# EAGLE board NE555_2 (EAGLE 6.5.0)
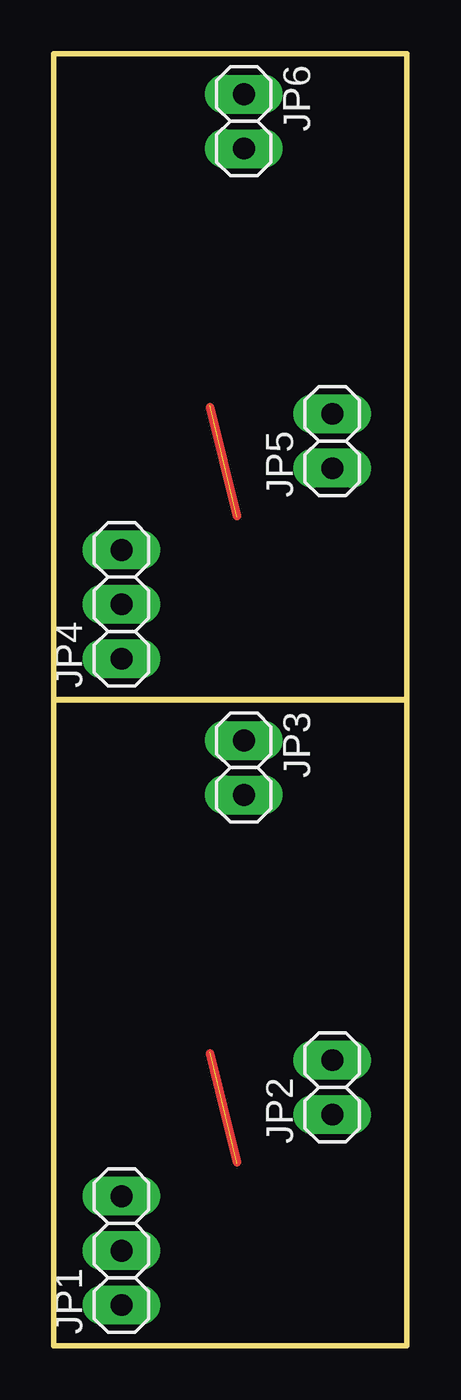
[diagram p0: board, top side]
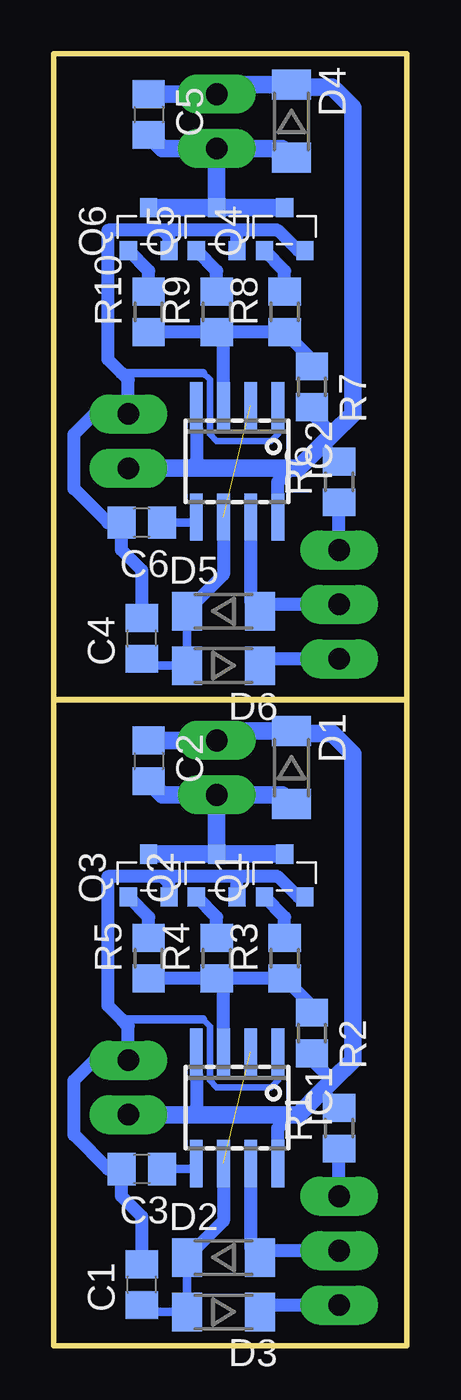
[diagram p1: board, bottom side, seen from below]

Size 16.51 x 60.31 mm. Coordinates in mm from the lower left corner, seen from the top.
Outline: 0,0 0,30.15
Outline: 0,30.16 0,60.31
Outline: 16.51,0 16.51,30.15 0.01,30.15 0.01,0 16.51,0
Outline: 16.51,30.16 16.51,60.31 0.01,60.31 0.01,30.16 16.51,30.16
Copper layers (1*16): Top 0.035mm / dielectric 1.5mm / Bottom 0.035mm
Design rules "default": minimum track width 12mil, minimum drill 32mil, track to track 12mil, track to pad 12mil, pad to pad 12mil, via to via 12mil, smd to smd 8mil, copper to edge 40mil, drill to drill 8mil, minimum pad ring 16mil, minimum via ring 12mil, stop-mask expansion 4mil, vias tented up to drill 0mil, thermal gap 20mil

## Footprints (pad centres in the part's own frame; a part is rotated, then mirrored left to right if it is on the bottom)
C0805 = smd 1.3 x 1.5: 1 -0.95,0; 2 0.95,0
SOD80 = smd 1.4 x 1.8: 1 -1.7,0; 2 1.7,0
SO08 = smd 0.6 x 2.2: 1 -1.905,-2.6; 2 -0.635,-2.6; 3 0.635,-2.6; 4 1.905,-2.6; 5 1.905,2.6; 6 0.635,2.6; 7 -0.635,2.6; 8 -1.905,2.6
1X03 = drill 1.016 long: 1 -2.54,0; 2 0,0; 3 2.54,0
1X02 = drill 1.016 long: 1 -1.27,0; 2 1.27,0
SOT-23-GSD = smd 0.8 x 0.9: D 0,2; G -0.95,0; S 0.95,0
R0805 = smd 1.3 x 1.5: 1 -0.95,0; 2 0.95,0

## Placement (x,y rotation side)
C1  2.7nF  [C0805]  12.38,2.86 90 bottom
C2  330nF  [C0805]  12.06,27.3 270 bottom
C3  1nF  [C0805]  12.38,8.26 180 bottom
C4  2.7nF  [C0805]  12.38,33.02 90 bottom
C5  330nF  [C0805]  12.06,57.47 270 bottom
C6  1nF  [C0805]  12.38,38.42 180 bottom
D1  DIODE  [SOD80]  5.4,26.99 270 bottom
D2  DIODE  [SOD80]  8.57,4.13 0 bottom
D3  DIODE  [SOD80]  8.57,1.59 180 bottom
D4  DIODE  [SOD80]  5.4,57.15 270 bottom
D5  DIODE  [SOD80]  8.57,34.29 0 bottom
D6  DIODE  [SOD80]  8.57,31.75 180 bottom
IC1  NE555  [SO08]  7.94,11.11 180 bottom
IC2  NE555  [SO08]  7.94,41.27 180 bottom
JP1  [1X03]  3.17,4.45 90 top
JP2  [1X02]  13.02,12.06 90 top
JP3  [1X02]  8.89,26.99 270 top
JP4  [1X03]  3.17,34.61 90 top
JP5  [1X02]  13.02,42.23 90 top
JP6  [1X02]  8.89,57.15 270 top
Q1  SI2302  [SOT-23-GSD]  5.71,20.95 0 bottom
Q2  SI2302  [SOT-23-GSD]  8.89,20.95 0 bottom
Q3  SI2302  [SOT-23-GSD]  12.06,20.95 0 bottom
Q4  SI2302  [SOT-23-GSD]  5.71,51.12 0 bottom
Q5  SI2302  [SOT-23-GSD]  8.89,51.12 0 bottom
Q6  SI2302  [SOT-23-GSD]  12.06,51.12 0 bottom
R1  1k  [R0805]  3.17,10.16 90 bottom
R2  1k  [R0805]  4.45,14.61 270 bottom
R3  240  [R0805]  5.71,18.1 90 bottom
R4  240  [R0805]  8.89,18.1 90 bottom
R5  240  [R0805]  12.06,18.1 90 bottom
R6  1k  [R0805]  3.17,40.32 90 bottom
R7  1k  [R0805]  4.45,44.77 270 bottom
R8  240  [R0805]  5.71,48.26 90 bottom
R9  240  [R0805]  8.89,48.26 90 bottom
R10  240  [R0805]  12.06,48.26 90 bottom

## Library data of the parts
C1-C6 R1-R10 = rcl
D1-D6 IC1 IC2 Q1-Q6 = usb
JP1-JP6 = pinhead

## Nets
GND: C1.2 C3.2 IC1.1 JP2.2 Q1.S Q2.S Q3.S
GND1: C4.2 C6.2 IC2.1 JP5.2 Q4.S Q5.S Q6.S
N$1: C2.1 D1.1 IC1.4 IC1.8 JP2.1 JP3.1 R1.2 R2.2
N$2: IC1.3 R2.1 R3.1 R4.1 R5.1
N$3: C2.2 D1.2 JP3.2 Q1.D Q2.D Q3.D
N$4: Q1.G R3.2
N$5: Q2.G R4.2
N$7: Q3.G R5.2
N$8: C5.1 D4.1 IC2.4 IC2.8 JP5.1 JP6.1 R6.2 R7.2
N$9: C3.1 IC1.5
N$10: C1.1 D2.1 D3.2 IC1.2 IC1.6
N$11: IC2.3 R7.1 R8.1 R9.1 R10.1
N$12: D2.2 IC1.7 JP1.2
N$13: JP1.3 R1.1
N$14: D3.1 JP1.1
N$15: C5.2 D4.2 JP6.2 Q4.D Q5.D Q6.D
N$16: Q4.G R8.2
N$17: Q5.G R9.2
N$18: Q6.G R10.2
N$19: C6.1 IC2.5
N$20: C4.1 D5.1 D6.2 IC2.2 IC2.6
N$21: D5.2 IC2.7 JP4.2
N$22: JP4.3 R6.1
N$23: D6.1 JP4.1

## Tracks (layer width: path | path; a pad name or v marks a point on that pad's centre or on a via)
GND
  Bottom 0.305: IC1.1 6.03,12.38 6.35,12.06 8.89,12.06 9.21,12.38 9.21,14.92 9.53,15.24
  Bottom 0.406: C3.2 13.33,7.62 | 9.53,15.24 13.34,15.24
  Bottom 0.61: Q1.S 5.08,20.95 6.03,21.91 7.94,21.91 | 7.94,21.91 11.43,21.91 | 11.43,21.91 13.97,21.91 13.97,15.88 13.34,15.24 13.02,14.92 JP2.2 14.61,13.34 15.56,12.38 15.56,9.84 13.97,8.25 C3.2 | Q3.S 11.12,21.59 11.43,21.91 | Q2.S 7.94,21.91 | C1.2 12.38,6.03 13.34,6.99 C3.2 | C3.2
GND1
  Bottom 0.305: IC2.1 6.03,42.55 6.35,42.23 8.89,42.23 9.21,42.55 9.21,45.09 9.53,45.4
  Bottom 0.406: C6.2 13.33,37.78 | 9.53,45.4 13.34,45.4
  Bottom 0.61: Q4.S 5.08,51.12 6.03,52.07 7.94,52.07 | 7.94,52.07 11.43,52.07 | 11.43,52.07 13.97,52.07 13.97,46.04 13.34,45.4 13.02,45.09 JP5.2 14.61,43.5 15.56,42.55 15.56,40.01 13.97,38.41 C6.2 | Q6.S 11.12,51.76 11.43,52.07 | Q5.S 7.94,52.07 | C4.2 12.38,36.2 13.34,37.15 C6.2 | C6.2
N$1
  Bottom 0.406: IC1.4 9.84,12.7
  Bottom 0.61: R1.2 3.97,11.91 | R2.2 4.45,13.34 3.49,12.38 | IC1.8 6.03,10.16 5.4,10.79 | 9.84,12.7 9.84,11.11 10.16,10.79
  Bottom 0.813: JP2.1 10.16,10.79 5.4,10.79 5.08,10.79 3.97,11.91 3.49,12.38 2.54,13.34 2.54,27.62 3.49,28.57 5.29,28.57 D1.1 8.46,28.69 JP3.1 C2.1
N$2
  Bottom 0.406: 6.03,16.83 R3.1
  Bottom 0.61: IC1.3 8.57,16.83 R4.1 | R2.1 4.45,15.88 R3.1 R4.1 | R4.1 R5.1
N$3
  Bottom 0.61: 5.71,24.97 D1.2
  Bottom 0.813: Q2.D Q3.D | Q2.D Q1.D | Q2.D JP3.2 | JP3.2 5.83,25.72 D1.2 | JP3.2 11.43,25.72 C2.2
N$4
  Bottom 0.61: R3.2 5.71,20 Q1.G
N$5
  Bottom 0.61: R4.2 8.89,20 Q2.G
N$6
  Top 0.406: 8.57,8.57 7.3,13.65
N$7
  Bottom 0.61: R5.2 12.06,20 Q3.G
N$8
  Bottom 0.406: IC2.4 9.84,42.86
  Bottom 0.61: R6.2 3.97,42.07 | R7.2 4.45,43.5 3.49,42.55 | IC2.8 6.03,40.32 5.4,40.96 | 9.84,42.86 9.84,41.27 10.16,40.96
  Bottom 0.813: JP5.1 10.16,40.96 5.4,40.96 5.08,40.96 3.97,42.07 3.49,42.55 2.54,43.5 2.54,57.78 3.49,58.74 5.29,58.74 D4.1 8.46,58.85 JP6.1 C5.1
N$9
  Bottom 0.406: C3.1 10.1,8.26 IC1.5
N$10  (1 unrouted)
  Bottom 0.406: 10.27,4.33 D2.1 D3.2 12.06,1.59 C1.1
  Bottom 0.61: IC1.6 8.57,5.83 D2.1
N$11
  Bottom 0.406: 6.03,46.99 R8.1
  Bottom 0.61: IC2.3 8.57,46.99 R9.1 | R7.1 4.45,46.04 R8.1 R9.1 | R9.1 R10.1
N$12
  Bottom 0.61: JP1.2 6.55,4.45 D2.2 7.3,4.56 IC1.7
N$13
  Bottom 0.61: JP1.3 R1.1
N$14
  Bottom 0.61: JP1.1 6.55,1.91 D3.1
N$15
  Bottom 0.61: 5.71,55.13 D4.2
  Bottom 0.813: Q5.D Q6.D | Q5.D Q4.D | Q5.D JP6.2 | JP6.2 5.83,55.88 D4.2 | JP6.2 11.43,55.88 C5.2
N$16
  Bottom 0.61: R8.2 5.71,50.17 Q4.G
N$17
  Bottom 0.61: R9.2 8.89,50.17 Q5.G
N$18
  Bottom 0.61: R10.2 12.06,50.17 Q6.G
N$19
  Bottom 0.406: C6.1 10.1,38.42 IC2.5
N$20  (1 unrouted)
  Bottom 0.406: 10.27,34.49 D5.1 D6.2 12.06,31.75 C4.1
  Bottom 0.61: IC2.6 8.57,35.99 D5.1
N$21
  Bottom 0.61: JP4.2 6.55,34.61 D5.2 7.3,34.72 IC2.7
N$22
  Bottom 0.61: JP4.3 R6.1
N$23
  Bottom 0.61: JP4.1 6.55,32.07 D6.1
N$24
  Top 0.406: 8.57,38.73 7.3,43.81

## Text on the board
S: + | - | OUT | - | + | R | IN | + | - | OUT | - | + | R | IN